# EAGLE board Cislo_OneWire (EAGLE 8.0.2)
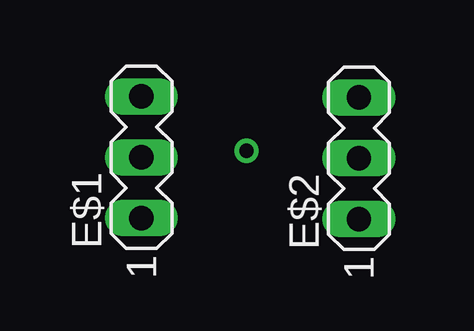
[diagram p0: board, top side]
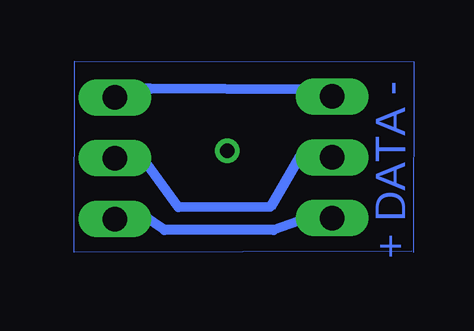
[diagram p1: board, bottom side, seen from below]

No outline drawn. Coordinates in mm, seen from the top.
Copper layers (1*16): Top 0.035mm / dielectric 1.5mm / Bottom 0.035mm
Design rules "default": minimum track width 10mil, minimum drill 24mil, track to track 8mil, track to pad 8mil, pad to pad 8mil, via to via 8mil, smd to smd 8mil, copper to edge 40mil, drill to drill 8mil, minimum pad ring 10mil, minimum via ring 8mil, stop-mask expansion 4mil, vias tented up to drill 0mil, thermal gap 10mil

## Footprints (pad centres in the part's own frame; a part is rotated, then mirrored left to right if it is on the bottom)
MA03-1 = drill 1.016 long: 1 -2.54,0; 2 0,0; 3 2.54,0

## Placement (x,y rotation side)
E$1  [MA03-1]  3.38,3.93 90 top
E$2  [MA03-1]  12.45,3.89 90 top

## Library data of the parts
E$1 E$2 = con-lstb

## Tracks (layer width: path | path; a pad name or v marks a point on that pad's centre or on a via)
S$1  (via drill 0.6 pad 1.02)
  other vias: 7.76,4.21
S$2
  Bottom 0.406: 4.69,6.76 10.94,6.79 11.72,6.81
S$3
  Bottom 0.406: 4.34,3.98 4.74,3.95 5.96,1.86 9.79,1.84 11.29,3.9
S$4
  Bottom 0.406: 4.49,1.28 4.45,1.37 5.81,0.89 10.38,0.89 11.23,1.48
S$5
  Bottom 0: 0.06,0 14.15,-0.04 14.13,7.95 -0.02,7.93 0,-0.03

## Text on the board
Bottom: + DATA -